# Altium PCB PCB1.PcbDoc
Units mm, origin at the board's own origin, x right, y up, seen from the top; angles counter-clockwise.
Board outline 70 x 68 mm, 2 copper layers (Top Layer, Bottom Layer); 82 components, 56 nets, 291 pads, 0 vias.
Unrouted connection lines stored in the file: 171.
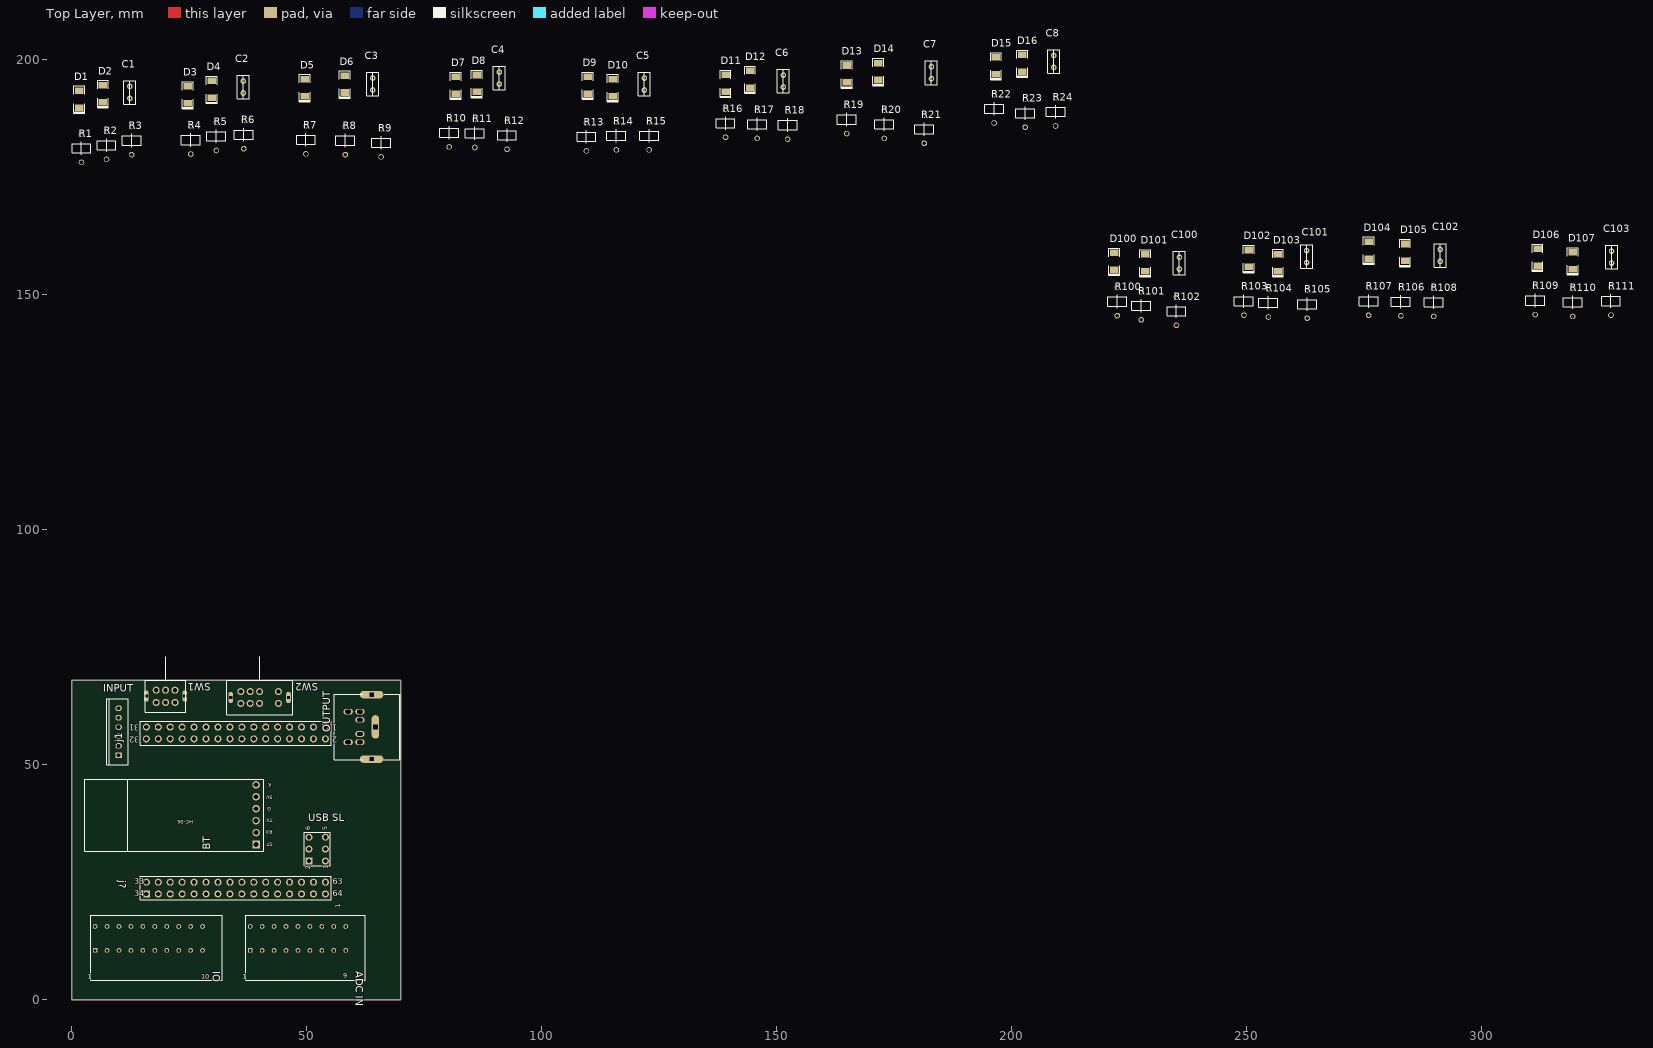
[diagram p0: Top Layer view]
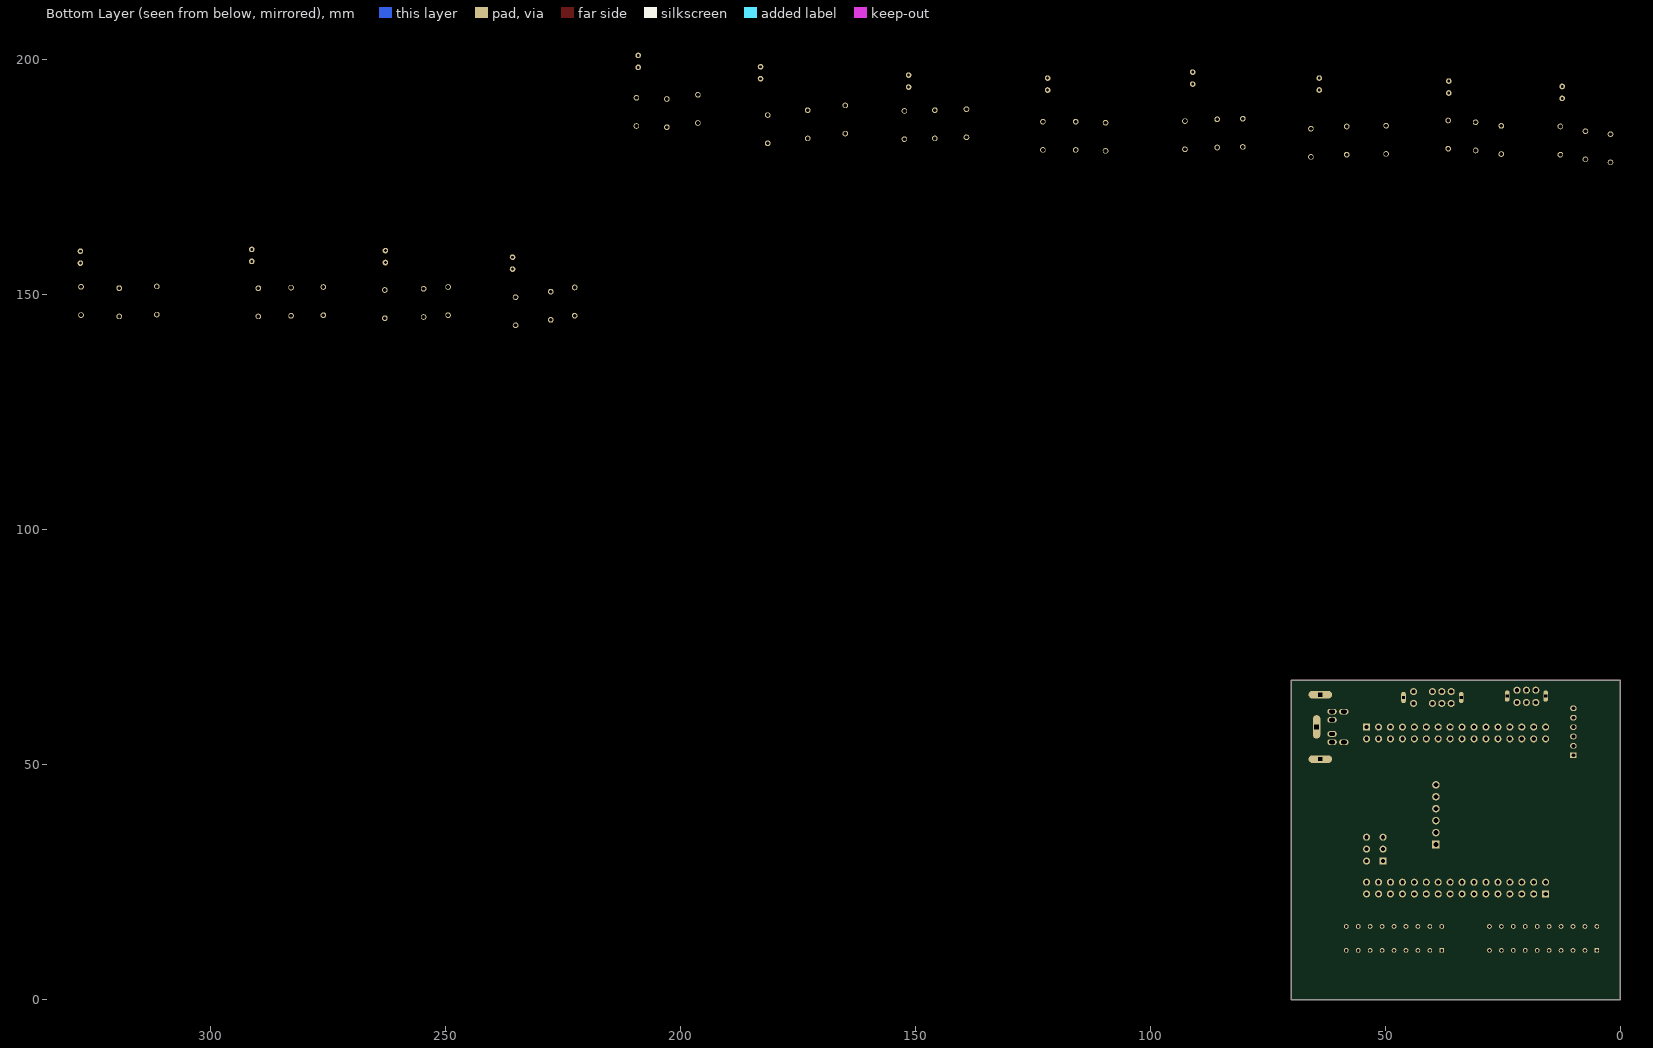
[diagram p1: Bottom Layer view, seen from below]

## Layer stack, top to bottom
Top Solder: solder mask 0.0102, Solder Resist, Dk 3.5
Top Layer: signal copper 0.0356
Dielectric 1: dielectric 0.32, FR-4, Dk 4.8
Bottom Layer: signal copper 0.0356
Bottom Solder: solder mask 0.0102, Solder Resist, Dk 3.5

## Board outline
0,0 0,68 70,68 70,0

## Design rules (kind name [scope] priority, off if disabled: settings)
Clearance [All] p1: gap=0.254 ignorepadtopadclearanceinfootprint=FALSE except(0: Arc-Hole Track-Hole SMDPad-Hole THPad-Hole Via-Hole Fill-Hole Poly-Hole Region-Hole Text-Hole)
PolygonConnect [All] p1: connectstyle=Relief reliefconductorwidth=0.254 reliefentries=4 polygonreliefangle="90 Angle" airgapwidth=0.254
RoutingVias [All] p1: holewidth=0.711 width=1.27 viastyle="Through Hole" minholewidth=0.711 minwidth=1.27 maxholewidth=0.711 maxwidth=1.27
SolderMaskExpansion [All] p1: expansion=0.102 istentingtop=FALSE
Width [All] p1: maxlimit=0.254 minlimit=0.254 preferedwidth=0.254
30 further rules are at their usual default settings.

## Components (designator, comment, footprint, x,y, rotation, side; value= is the part's Value field where it differs from the comment)
"ADC IN" "SL900R-9" SR-900R-9 38,5 r0 top
BT "HC-06" HC-06 39.243,33.02 r180 top
C1 "Cap" CAP103 12.387,191.77 r90 top value=102pF
C2 "Cap" CAP103 36.517,192.913 r90 top value=102pF
C3 "Cap" CAP103 64.076,193.548 r90 top value=102pF
C4 "Cap" CAP103 91,194.818 r90 top value=102pF
C5 "Cap" CAP103 121.861,193.548 r90 top value=102pF
C6 "Cap" CAP103 151.452,194.183 r90 top value=102pF
C7 "Cap" CAP103 182.948,195.961 r90 top value=102pF
C8 "Cap" CAP103 208.983,198.374 r90 top value=102pF
C100 "Cap" CAP103 235.712,155.448 r90 top value=102pF
C101 "Cap" CAP103 262.763,156.845 r90 top value=102pF
C102 "Cap" CAP103 291.211,157.099 r90 top value=102pF
C103 "Cap" CAP103 327.66,156.718 r90 top value=102pF
D1 "ZMM5232B" ZMM5232B 1.592,191.621 r90 top
D2 "ZMM5232B" ZMM5232B 6.672,192.786 r90 top
D3 "ZMM5232B" ZMM5232B 24.706,192.554 r90 top
D4 "ZMM5232B" ZMM5232B 29.786,193.697 r90 top
D5 "ZMM5232B" ZMM5232B 49.598,194.056 r90 top
D6 "ZMM5232B" ZMM5232B 58.107,194.818 r90 top
D7 "ZMM5232B" ZMM5232B 81.729,194.564 r90 top
D8 "ZMM5232B" ZMM5232B 86.174,194.945 r90 top
D9 "ZMM5232B" ZMM5232B 109.796,194.564 r90 top
D10 "ZMM5232B" ZMM5232B 115.13,194.056 r90 top
D11 "ZMM5232B" ZMM5232B 139.133,194.967 r90 top
D12 "ZMM5232B" ZMM5232B 144.34,195.856 r90 top
D13 "ZMM5232B" ZMM5232B 164.914,196.977 r90 top
D14 "ZMM5232B" ZMM5232B 171.645,197.485 r90 top
D15 "ZMM5232B" ZMM5232B 196.664,198.733 r90 top
D16 "ZMM5232B" ZMM5232B 202.252,199.263 r90 top
D100 "ZMM5232B" ZMM5232B 221.869,157.121 r90 top
D101 "ZMM5232B" ZMM5232B 228.435,156.816 r90 top
D102 "ZMM5232B" ZMM5232B 250.444,157.712 r90 top
D103 "ZMM5232B" ZMM5232B 256.667,156.823 r90 top
D104 "ZMM5232B" ZMM5232B 275.971,159.49 r90 top
D105 "ZMM5232B" ZMM5232B 283.718,158.982 r90 top
D106 "ZMM5232B" ZMM5232B 311.912,157.966 r90 top
D107 "ZMM5232B" ZMM5232B 319.405,157.226 r90 top
INPUT "2.54mm 6 HOLE" SMW200-06 10,52 r90 top
IO "SL900R-10" SR-900R-10 5,5 r0 top
j1 "Component_1" Component_1 54,58 r180 top (schematic designator J1)
j? "Component_2" Component_2 54,22.5 r0 top
OUTPUT "DIN6PIN" TAIT-MDS-508B6L_V 69.843,58.039 r180 top
R1 "Res1" R1/4W 2.1,178.15 r90 top value=1M
R2 "Res1" R1/4W 7.434,178.785 r90 top value=1K
R3 "Res1" R1/4W 12.768,179.801 r90 top value=1K
R4 "Res1" R1/4W 25.341,179.928 r90 top value=1M
R5 "Res1" R1/4W 30.802,180.69 r90 top value=1K
R6 "Res1" R1/4W 36.644,181.071 r90 top value=1K
R7 "Res1" R1/4W 49.852,179.959 r90 top value=1M
R8 "Res1" R1/4W 58.234,179.801 r90 top value=1K
R9 "Res1" R1/4W 65.854,179.324 r90 top value=1K
R10 "Res1" R1/4W 80.332,181.452 r90 top value=1M
R11 "Res1" R1/4W 85.793,181.325 r90 top value=1K
R12 "Res1" R1/4W 92.651,180.944 r90 top value=1K
R13 "Res1" R1/4W 109.542,180.594 r90 top value=1M
R14 "Res1" R1/4W 115.892,180.817 r90 top value=1K
R15 "Res1" R1/4W 122.877,180.817 r90 top value=1K
R16 "Res1" R1/4W 139.133,183.484 r90 top value=1M
R17 "Res1" R1/4W 145.864,183.261 r90 top value=1K
R18 "Res1" R1/4W 152.341,183.103 r90 top value=1K
R19 "Res1" R1/4W 164.914,184.277 r90 top value=1M
R20 "Res1" R1/4W 172.915,183.261 r90 top value=1K
R21 "Res1" R1/4W 181.424,182.214 r90 top value=1K
R22 "Res1" R1/4W 196.283,186.532 r90 top value=1M
R23 "Res1" R1/4W 202.887,185.643 r90 top value=1K
R24 "Res1" R1/4W 209.364,185.897 r90 top value=1K
R100 "Res1" R1/4W 222.504,145.542 r90 top value=1M
R101 "Res1" R1/4W 227.584,144.653 r90 top value=1K
R102 "Res1" R1/4W 235.077,143.479 r90 top value=1K
R103 "Res1" R1/4W 249.428,145.638 r90 top value=1M
R104 "Res1" R1/4W 254.635,145.257 r90 top value=1K
R105 "Res1" R1/4W 262.89,145.003 r90 top value=1K
R106 "Res1" R1/4W 282.829,145.511 r90 top value=1M
R107 "Res1" R1/4W 275.971,145.638 r90 top value=1K
R108 "Res1" R1/4W 289.814,145.384 r90 top value=1K
R109 "Res1" R1/4W 311.404,145.765 r90 top value=1M
R110 "Res1" R1/4W 319.405,145.384 r90 top value=1K
R111 "Res1" R1/4W 327.533,145.669 r90 top value=1K
SW1 "OS202011MA0QN1" OS202011MA0QN1 20,68 r270 top
SW2 "OS203011MA2QP1" OS203011MA2QP1 40,68 r270 top
"USB SL" "Header 3X2" "USB SEL" 54,29.5 r90 top

## Footprints (in the part's own frame and the unit in brackets; to place one, negate y for a bottom-side part, rotate by r counter-clockwise, add the part's x,y. Pads: shape width x height; smd on the part's side, far side on the other; paste and mask are expansions set on the pad)
CAP103 [mm]
  round 1.2 hole 0.6: 1(0,0) 2(2.54,0)
  silkscreen extent -1.23,-1.27 3.78,1.27
Component_1 [mm] "Connector; Header; 16x2 Position"
  rect 1.5x1.5 hole 0.9: 1(0,0)
  round 1.5 hole 0.9: 2(0,2.5) 3(2.54,0) 4(2.54,2.5) 5(5.08,0) 6(5.08,2.5) 7(7.62,0) 8(7.62,2.5) 9(10.16,0) 10(10.16,2.5) 11(12.7,0) 12(12.7,2.5) 13(15.24,0) 14(15.24,2.5) 15(17.78,0) 16(17.78,2.5) 17(20.32,0) 18(20.32,2.5) 19(22.86,0) 20(22.86,2.5) 21(25.4,0) 22(25.4,2.5) 23(27.94,0) 24(27.94,2.5) 25(30.48,0) 26(30.48,2.5) 27(33.02,0) 28(33.02,2.5) 29(35.56,0) 30(35.56,2.5) 31(38.1,0) 32(38.1,2.5)
  silkscreen extent -1.27,-1.27 39.37,3.81
Component_2 [mm] "Connector; Header; 16x2 Position"
  round 1.5 hole 0.9: 33(-38.1,2.5) 35(-35.56,2.5) 36(-35.56,0) 37(-33.02,2.5) 38(-33.02,0) 39(-30.48,2.5) 40(-30.48,0) 41(-27.94,2.5) 42(-27.94,0) 43(-25.4,2.5) 44(-25.4,0) 46(-22.86,0) 47(-22.86,2.5) 47(-20.32,2.5) 48(-20.32,0) 49(-17.78,2.5) 50(-17.78,0) 51(-15.24,2.5) 52(-15.24,0) 53(-12.7,2.5) 54(-12.7,0) 55(-10.16,2.5) 56(-10.16,0) 57(-7.62,2.5) 58(-7.62,0) 59(-5.08,2.5) 60(-5.08,0) 61(-2.54,2.5) 62(-2.54,0) 63(0,2.5) 64(0,0)
  rect 1.5x1.5 hole 0.9: 34(-38.1,0)
  silkscreen extent -39.37,-1.27 1.27,3.81
HC-06 [mm]
  rect 1.6x1.6 hole 1.02: 1(0,0)
  round 1.6 hole 1.02: 2(0,-2.54) 3(0,-5.08) 4(0,-7.62) 5(0,-10.16) 6(0,-12.7)
  silkscreen extent -1.6,-13.9 36.4,1.4, body extent -6.5,-13.75 36.25,1.25, height 8
OS202011MA0QN1 [mm] "Mini DIN Connector"
  round 1.5 hole 0.8: 1(4.75,2) 2(4.75,0) 3(4.75,-2) 4(2.15,2) 5(2.15,0) 6(2.15,-2)
  oval 2.4x1 hole 0.6 square: MH1(3.4,4.1) MH2(3.4,-4.1)
  silkscreen extent -5,-4.3 6.8,4.3
OS203011MA2QP1 [mm] "Mini DIN Connector"
  round 1.5 hole 0.8: 1(4.95,4) 2(4.95,0) 3(4.95,-2) 4(4.95,-4) 5(2.45,4) 6(2.45,0) 7(2.45,-2) 8(2.45,-4)
  oval 2.4x1 hole 0.6 square: MH1(3.7,6.15) MH2(3.7,-6.15)
  silkscreen extent -5,-7 7.4,7
R1/4W [mm]
  round 1.2 hole 0.8: 1(0,0) 2(6,0)
  silkscreen extent 1.6,-2 4.4,2
SMW200-06 [mm] "Connector; Header; 6 Position"
  rect 1.2x1.4 hole 0.8: 1(0,0)
  oval 1.2x1.4 hole 0.8: 2(2,0) 3(4,0) 4(6,0) 5(8,0) 6(10,0)
  silkscreen extent -2,-2 12,2.5
SR-900R-9 [mm] "Connector; Header; 11x2 Position"
  round 1 hole 0.6: 0(0,10.58) 0(2.54,10.58) 0(5.08,10.58) 0(7.62,10.58) 0(10.16,10.58) 0(12.7,10.58) 0(15.25,10.58) 0(17.78,10.58) 0(20.32,10.58) 2(2.54,5.5) 3(5.08,5.5) 4(7.62,5.5) 5(10.16,5.5) 6(12.7,5.5) 7(15.25,5.5) 8(17.78,5.5) 9(20.32,5.5)
  rect 1x1 hole 0.6: 1(0,5.5)
  silkscreen extent -0.9,-0.9 24.51,13
SR-900R-10 [mm] "Connector; Header; 11x2 Position"
  round 1 hole 0.6: 0(0,10.58) 0(2.54,10.58) 0(5.08,10.58) 0(7.62,10.58) 0(10.16,10.58) 0(12.7,10.58) 0(15.25,10.58) 0(17.78,10.58) 0(20.32,10.58) 0(22.86,10.58) 2(2.54,5.5) 3(5.08,5.5) 4(7.62,5.5) 5(10.16,5.5) 6(12.7,5.5) 7(15.25,5.5) 8(17.78,5.5) 9(20.32,5.5) 10(22.86,5.5)
  rect 1x1 hole 0.6: 1(0,5.5)
  silkscreen extent -0.9,-0.9 27.05,13
TAIT-MDS-508B6L_V [mm] "Mini DIN Connector"
  oval 2x1.2 hole 1.2 slot 0.8 at 90 deg: 1(8.5,-1.5) 2(8.5,1.5) 3(8.5,-3.25) 4(8.5,3.25) 5(11,-3.25) 6(11,3.25)
  oval 1.6x5 hole 0.9 square unplated: MH1(5.2,0)
  oval 5x1.6 hole 0.8 square: MH2(6,6.85) MH3(6,-6.85)
  silkscreen extent -0.05,-7 14,7.02, body extent -0.1,-7.03 12.7,6.97, height 13
"USB SEL" [mm] "Connector; Header; 11x2 Position"
  rect 1.5x1.5 hole 0.9: 1(0,3.5)
  round 1.5 hole 0.9: 2(2.54,3.5) 3(5.08,3.5) 4(0,0) 5(2.54,0) 6(5.08,0)
  silkscreen extent -1,-1 6.08,4.5
ZMM5232B [mm] "SMT LED; 2 Flat Leads"
  rect 1.4x1.8 smd: 1(-1.8,0) 2(1.8,0)
  silkscreen extent -3,-1.15 2.8,1.15

## Part data
"ADC IN": library part "Header 9", "Header, 9-Pin", LatestRevisionDate=17-Jul-2002, LatestRevisionNote="Re-released for DXP Platform.", Publisher="Altium Limited"
BT INPUT: library part "Header 6", "Header, 6-Pin", LatestRevisionDate=17-Jul-2002, LatestRevisionNote="Re-released for DXP Platform.", Publisher="Altium Limited"
C1 C2 C3 C4 C5 C6 C7 C8: library part CAP, LatestRevisionDate=17-Jul-2002, LatestRevisionNote="Re-released for DXP Platform.", PackageDescription="Radial Cap, Thru-Hole; 2 Leads; 0.3 in Pin Spacing", PackageReference=RAD-0.3, Published=8-Jun-2000, Publisher="Altium Limited"
C100 C101 C102 C103: "Capacitor", LatestRevisionDate=17-Jul-2002, LatestRevisionNote="Re-released for DXP Platform.", PackageDescription="Radial Cap, Thru-Hole; 2 Leads; 0.3 in Pin Spacing", PackageReference=RAD-0.3, Published=8-Jun-2000, Publisher="Altium Limited"
D1 D2 D3 D4 D5 D6 D7 D8: library part ONSC-K1K2A3-3, "40 W Peak Power Zener Transient Voltage Suppressor, Dual Common Anode Zeners for ESD Protection, 3-Pin SOT-23, Pb-Free, Tape and Reel", LatestRevisionDate=17-Jul-2002, LatestRevisionNote="Re-released for DXP Platform.", PackageDescription="Diode, Thru-Hole; 2 Leads; 0.7 in Pin Spacing", PackageReference=DIODE-0.7, Published=8-Jun-2000, Publisher="Altium Limited"
D9 D10 D11 D12 D13 D14 D15 D16 D100 D101 D102 D103 D104 D105 D106 D107: library part "D Zener", "Zener Diode", LatestRevisionDate=17-Jul-2002, LatestRevisionNote="Re-released for DXP Platform.", PackageDescription="Diode, Thru-Hole; 2 Leads; 0.7 in Pin Spacing", PackageReference=DIODE-0.7, Published=8-Jun-2000, Publisher="Altium Limited"
IO: library part "Header 10", "Header, 10-Pin", LatestRevisionDate=17-Jul-2002, LatestRevisionNote="Re-released for DXP Platform.", Publisher="Altium Limited"
j?: library part Component_1
OUTPUT: library part CUI-MD-60S-6, "Right Angle Mini DIN Connector, 100 Vac, 12 Vdc, -40 to 85 degC, 6-Pin THD, RoHS, Bulk", LatestRevisionDate=17-Jul-2002, LatestRevisionNote="Re-released for DXP Platform.", Publisher="Altium Limited"
R1 R2 R3 R4 R5 R6 R7 R8 R9 R10 R11 R12 R13 R14 R15 R16 R17 R18 R19 R20 R21 R22 R23 R24: library part RES-2, "Chip Resistor, 4.7 KOhm, +/- 1%, 0.125 W, -55 to 155 degC, 0805 (2012 Metric), RoHS, Tape and Reel", LatestRevisionDate=17-Jul-2002, LatestRevisionNote="Re-released for DXP Platform.", PackageDescription="Axial Device, Thru-Hole; 2 Leads; 0.3 in Pin Spacing", PackageReference=AXIAL-0.3, Published=8-Jun-2000, Publisher="Altium Limited"
R100 R101 R102 R103 R104 R105 R106 R107 R108 R109 R110 R111: "Resistor", LatestRevisionDate=17-Jul-2002, LatestRevisionNote="Re-released for DXP Platform.", PackageDescription="Axial Device, Thru-Hole; 2 Leads; 0.3 in Pin Spacing", PackageReference=AXIAL-0.3, Published=8-Jun-2000, Publisher="Altium Limited"
SW1: library part SW-DPDT-6, "Slide Switch, MHS Series, Double Pole, Vertical, 125 V (AC), -20 to 85 degC, 6-Pin THD, RoHS, Bulk", LatestRevisionDate=17-Jul-2002, LatestRevisionNote="Re-released for DXP Platform.", Publisher="Altium Limited"
SW2: library part CMP-17877-000002-1, "SWITCH SLIDE DP3T 200MA 30V", LatestRevisionDate=17-Jul-2002, LatestRevisionNote="Re-released for DXP Platform.", Publisher="Altium Limited"
"USB SL": "Header, 3-Pin, Dual row", LatestRevisionDate=17-Jul-2002, LatestRevisionNote="Re-released for DXP Platform.", Publisher="Altium Limited"

## Nets (pads, with @x,y where several pads share a name; then routed paths per layer and width w, separated by ;. In a path a pad name is that pad's centre, name@x,y a point inside that pad or via, vN(x,y) a via of type N, cw(c..) or ccw(c..) an arc to the next point about the centre after c; other vN are vias at no path point)
5V: BT.5 D1.2 D3.2 D5.2 D7.2 D9.2 D11.2 D13.2 D15.2 D100.2 D102.2 D104.2 D106.2 INPUT.4 IO.10 j1.23 j1.24 j?.52 j?.64 OUTPUT.4
12V: INPUT.6 OUTPUT.6
ADC_IN_0: "ADC IN.1" R1.1 R2.2
ADC_IN_1: "ADC IN.2" R4.1 R5.2
ADC_IN_2: "ADC IN.3" R7.1 R8.2
ADC_IN_3: "ADC IN.4" R10.1 R11.2
ADC_IN_4: "ADC IN.5" R13.1 R14.2
ADC_IN_5: "ADC IN.6" R16.1 R17.2
ADC_IN_6: "ADC IN.7" R19.1 R20.2
ADC_IN_7: "ADC IN.8" R22.1 R23.2
BT(RX0): BT.2 SW1.1
BT(TX0): BT.3 SW1.4
GND: "ADC IN.9" BT.4 C1.2 C2.2 C3.2 C4.2 C5.2 C6.2 C7.2 C8.2 C100.2 C101.2 C102.2 C103.2 D2.1 D4.1 D6.1 D8.1 D10.1 D12.1 D14.1 D16.1 D101.1 D103.1 D105.1 D107.1 INPUT.3 IO.9 j1.21 j1.22 j?.53 j?.63 OUTPUT.3 R1.2 R4.2 R7.2 R10.2 R13.2 R16.2 R19.2 R22.2 R100.2 R103.2 R106.2 R109.2
IN_RX(SDA): INPUT.1 SW2.6
IN_TX(SCL): INPUT.5 OUTPUT.5 SW2.2 SW2.4
NetD1_1: D1.1 D2.2 R2.1 R3.2
NetD3_1: D3.1 D4.2 R5.1 R6.2
NetD5_1: D5.1 D6.2 R8.1 R9.2
NetD7_1: D7.1 D8.2 R11.1 R12.2
NetD9_1: D9.1 D10.2 R14.1 R15.2
NetD11_1: D11.1 D12.2 R17.1 R18.2
NetD13_1: D13.1 D14.2 R20.1 R21.2
NetD15_1: D15.1 D16.2 R23.1 R24.2
NetD100_1: D100.1 D101.2 R101.1 R102.2
NetD102_1: D102.1 D103.2 R104.1 R105.2
NetD104_1: D104.1 D105.2 R107.1 R108.2
NetD106_1: D106.1 D107.2 R110.1 R111.2
OUT_RX(SDA): OUTPUT.1 SW2.8
PD0_1(SCL): j1.25 SW2.3
PD1_1(SDA): j1.26 SW2.7
PD2_1(RX1): "USB SL.1" j1.27 SW2.1
PD3_1(TX1): "USB SL.4" j1.28 SW2.5
PE0_1(RX0): "USB SL.3" j1.2 SW1.2
PE1_1(TX0): "USB SL.6" j1.3 SW1.5
PE2_1: C100.1 j1.4 R102.1
PE3_1: C101.1 j1.5 R105.1
PE4_1: C102.1 j1.6 R108.1
PE5_1: C103.1 j1.7 R111.1
PF0_1(ADC0): C1.1 j?.61 R3.1
PF1_1(ADC1): C2.1 j?.60 R6.1
PF2_1(ADC2): C3.1 j?.59 R9.1
PF3_1(ADC3): C4.1 j?.58 R12.1
PF4_1(ADC4): C5.1 j?.57 R15.1
PF5_1(ADC5): C6.1 j?.56 R18.1
PF6_1(ADC6): C7.1 j?.55 R21.1
PF7_1(ADC7): C8.1 j?.54 R24.1
PG0_1: IO.5 j?.33
PG1_1: IO.6 j?.34
PG2_1: IO.7 j?.43
PG3_1: IO.8 j1.18
SW_IN_1: IO.1 R100.1 R101.2
SW_IN_2: IO.2 R103.1 R104.2
SW_IN_3: IO.3 R106.1 R107.2
SW_IN_4: IO.4 R109.1 R110.2
USB_RX: "USB SL.5" SW1.6
USB_TX: "USB SL.2" SW1.3
pads on no net: "ADC IN.0" BT.1 BT.6 INPUT.2 IO.0 j1.1 j1.8 j1.9 j1.10 j1.11 j1.12 j1.13 j1.14 j1.15 j1.16 j1.17 j1.19 j1.20 j1.29 j1.30 j1.31 j1.32 j?.35 j?.36 j?.37 j?.38 j?.39 j?.40 j?.41 j?.42 j?.44 j?.46 j?.47 j?.48 j?.49 j?.50 j?.51 j?.62 OUTPUT.2 OUTPUT.MH1 OUTPUT.MH2 OUTPUT.MH3 SW1.MH1 SW1.MH2 SW2.MH1 SW2.MH2
copper on no net: | length 276
  Top Layer w0.254: 0,0 0,68 70,68 70,0 0,0

## Dimensions
0,0 to 0,68 on Drill Drawing

## Text inside footprints (layer, text, board x,y; h text height)
"ADC IN": Top Overlay "9" at 57.812,4.619 h1; Top Overlay "1" at 36.4,4.492 h1
BT: Top Overlay "ST" at 42.843,33.44 h0.8 r180; Top Overlay "RX" at 42.843,36.04 h0.8 r180; Top Overlay "TX" at 42.843,38.54 h0.8 r180; Top Overlay "G" at 42.443,40.94 h0.8 r180; Top Overlay "5V" at 42.843,43.44 h0.8 r180; Top Overlay "K" at 42.443,46.04 h0.8 r180
IO: Top Overlay "1" at 3.4,4.492 h1; Top Overlay "10" at 27.606,4.492 h1
j1: Top Overlay "32" at 14.376,55.968 h1.27 r180; Top Overlay "31" at 14.376,58.508 h1.27 r180; Top Overlay "1" at 56.54,58.508 h1.27 r180; Top Overlay "2" at 56.54,55.968 h1.27 r180
j?: Top Overlay "33" at 13.36,24.532 h1.27; Top Overlay "34" at 13.36,21.992 h1.27; Top Overlay "64" at 55.524,21.992 h1.27; Top Overlay "63" at 55.524,24.532 h1.27
OUTPUT: Top 3D Body "PCB Edge" at 68.7,64.77 h0.8 r270
"USB SL": Top Overlay "6" at 50.825,36.028 h1 r90; Top Overlay "1" at 57.175,19.518 h1 r90; Top Overlay "1" at 54.508,27.722 h1 r90; Top Overlay "2" at 50.825,27.595 h1 r90; Top Overlay "5" at 54.381,36.028 h1 r90